# Altium PCB PCB1.PcbDoc
Units mil, origin at the board's own origin, x right, y up, seen from the top; angles counter-clockwise.
Board outline 2587.62 x 2587.62 mil, 2 copper layers (Top Layer, Bottom Layer); 11 components, 8 nets, 33 pads, 2 vias.
Unrouted connection lines stored in the file: 25.
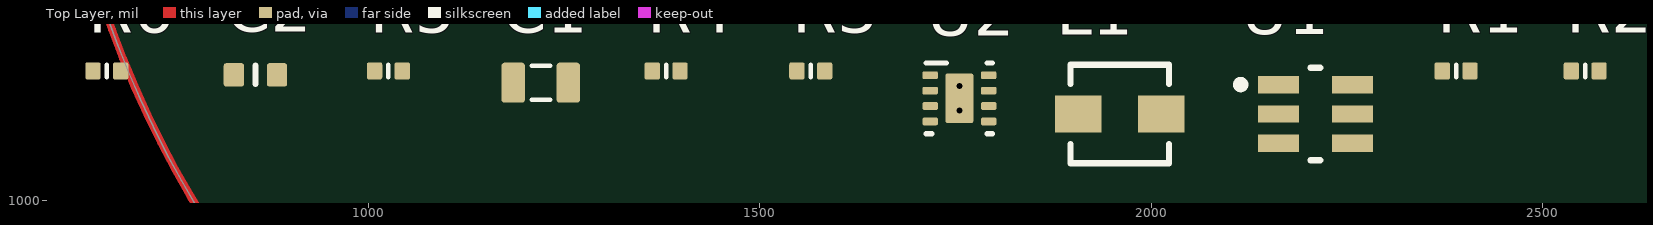
[diagram p0: Top Layer view]
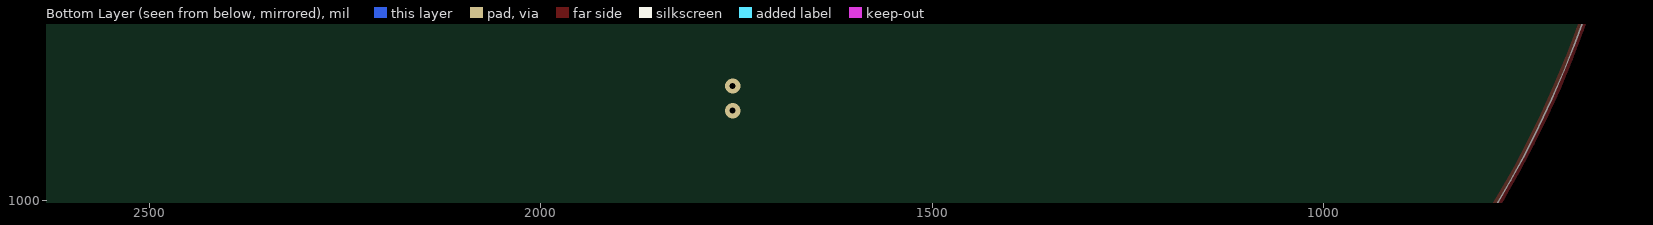
[diagram p1: Bottom Layer view, seen from below]

## Layer stack, top to bottom
Top Solder: solder mask 0.4, Solder Resist, Dk 3.5
Top Layer: signal copper 1.4
Dielectric 1: dielectric 12.6, FR-4, Dk 4.8
Bottom Layer: signal copper 1.4
Bottom Solder: solder mask 0.4, Solder Resist, Dk 3.5

## Board outline
593.57,1660.33 ccw(c1887.39,1660.33) 1887.39,366.52 ccw(c1887.39,1660.33) 3181.2,1660.33 ccw(c1887.39,1660.33) 1887.39,2954.14 ccw(c1887.39,1660.33)

## Design rules (kind name [scope] priority, off if disabled: settings)
Clearance [All] p1: gap=10 ignorepadtopadclearanceinfootprint=FALSE except(0: Arc-Hole Track-Hole SMDPad-Hole THPad-Hole Via-Hole Fill-Hole Poly-Hole Region-Hole Text-Hole)
PolygonConnect [All] p1: connectstyle=Relief reliefconductorwidth=10 reliefentries=4 polygonreliefangle="90 Angle" airgapwidth=10
RoutingVias [All] p1: holewidth=28 width=50 viastyle="Through Hole" minholewidth=28 minwidth=50 maxholewidth=28 maxwidth=50
SolderMaskExpansion [All] p1: expansion=4 istentingtop=FALSE
Width [All] p1: maxlimit=10 minlimit=10 preferedwidth=10
30 further rules are at their usual default settings.

## Components (designator, comment, footprint, x,y, rotation, side; value= is the part's Value field where it differs from the comment)
C1 "Capacitor 22µF +/-40% 16V 0805" CAPC0805(2012)145_L 1220,1150 r0 top value=22µF
C2 "Capacitor 10µF +/-20% 10V 0603" CAPC0603(1608)100_L 855,1160 r0 top value=10µF
L1 "IHLP1212BZER2R2M11" FP-IHLP-1212BZ-11-MFG 1960,1110 r0 top
R1 "Resistor 10K  +/-1 % 0402 63 mW" RESC0402(1005)_L 2390,1165 r0 top value=10k
R2 "Resistor 10K  +/-1 % 0402 63 mW" RESC0402(1005)_L 2555,1165 r0 top value=10k
R3 "Resistor 100K +/-1 % 0402 63 mW" RESC0402(1005)_L 1565,1165 r0 top value=100k
R4 "Resistor 100K +/-1 % 0402 63 mW" RESC0402(1005)_L 1380,1165 r0 top value=100k
R5 "Resistor 100K +/-1 % 0402 63 mW" RESC0402(1005)_L 1025,1165 r0 top value=100k
R6 "Resistor 100K +/-1 % 0402 63 mW" RESC0402(1005)_L 665,1165 r0 top value=100k
U1 "MAX16150AUT+T" FP-U6-1-MFG 2210,1110 r0 top
U2 "TPS62162DSGR" DSG0008A_V 1755,1130 r0 top

## Footprints (in the part's own frame and the unit in brackets; to place one, negate y for a bottom-side part, rotate by r counter-clockwise, add the part's x,y. Pads: shape width x height; smd on the part's side, far side on the other; paste and mask are expansions set on the pad)
CAPC0603(1608)100_L [mm] "Chip Capacitor, Body 1.6x0.8mm, Height 1.0mm, IPC High Density"
  rrect25% 0.66x0.76 smd: 1(-0.7,0) 2(0.7,0)
  silkscreen extent 0,-0.3 0,0.3, body extent -0.8,-0.4 0.8,0.4, height 0.95
CAPC0805(2012)145_L [mm] "Chip Capacitor, Body 2.0x1.2mm, Height 1.45mm, IPC High Density"
  rrect25% 0.76x1.3 smd: 1(-0.9,0) 2(0.89,0)
  silkscreen extent -0.3,-0.55 0.3,0.55, body extent -1,-0.6 1,0.6, height 1.45
DSG0008A_V [mm] "SON, 8-Leads, Body 2x2mm, Pitch 0.5mm, Thermal Pad 1.6x0.9mm, TI Recommended"
  rrect40% 0.5x0.25 smd: 1(-0.95,0.75) 2(-0.95,0.25) 3(-0.95,-0.25) 4(-0.95,-0.75) 5(0.95,-0.75) 6(0.95,-0.25) 7(0.95,0.25) 8(0.95,0.75)
  rrect11% 0.9x1.6 smd paste-0.45: 9(0,0)
  silkscreen extent -1.07,-1.15 1.07,1.15, body extent -1.05,-1.05 1.05,1.05, height 0.8
FP-IHLP-1212BZ-11-MFG [mm]
  rect 1.5x1.2 smd paste+0 mask+0: 1(-1.35,0) 2(1.35,0)
  silkscreen extent -1.6,-1.6 1.6,1.6, body extent -2.2,-1.7 2.2,1.7, height 0.25
FP-U6-1-MFG [mm]
  rect 1.33x0.56 smd paste+0 mask+0: 1(-1.2,0.95) 2(-1.2,0) 3(-1.2,-0.95) 4(1.2,-0.95) 5(1.2,0) 6(1.2,0.95)
  silkscreen extent -2.55,-1.5 0.16,1.5, body extent -1.96,-1.73 1.96,1.73, height 0.25
RESC0402(1005)_L [mm] "Chip Resistor, Body 1.0x0.5mm, IPC High Density"
  rrect25% 0.5x0.55 smd: 1(-0.45,0) 2(0.45,0)
  silkscreen extent 0,-0.2 0,0.2, body extent -0.5,-0.25 0.5,0.25, height 0.3

## Part data
C1: library part CMP-001-00081-4, "Chip Capacitor, 22µF +/-40%, 16V, 0805, Thickness 1.45 mm", Case/Package=0805, Max Operating Temperature=85°C, Min Operating Temperature=-55°C, Tolerance=5%, Voltage Rating=16V, Mounting Technology=SMT, Pins=2
C2: library part CMP-001-00075-4, "Chip Capacitor, 10µF +/-20%, 10V, 0603, Thickness 1 mm", Case/Package=0603, Max Operating Temperature=85°C, Min Operating Temperature=-55°C, Tolerance=10%, Voltage Rating=10V, Mounting Technology=SMT, Pins=2
L1: library part CMP-02424-000689-1, "FIXED IND 2.2UH 3A 46 MOHM SMD", Case/Package=1212, Current Rating=3A, DC Resistance (DCR)=46mR, Inductance=2.2uH, Inductance Tolerance=20%, Max Operating Temperature=125°C, Min Operating Temperature=-55°C, Package Quantity=3000, Saturation Current=3.3A, Self Resonant Frequency=55MHz, Test Frequency=100kHz, Contact Plating=Tin, Core Material=Metal, Depth=3.2mm, Height=2mm, Height - Seated (Max)=0.079inch, Lead Free="Lead Free", Length=3.6mm, Max DC Current=3A, Military Standard=Not, Mount="Surface Mount", Number of Pins=2, Packaging="Tape and Reel", Radiation Hardening=No, Rated Current-Max=3A, RMS Current (Irms)=3A, RoHS Compliant=Yes, Series=IHLP-1212BZ-11, Shielding=Shielded, Termination=SMD/SMT, Tolerance=20%, Width=3mm
R1 R2: library part CMP-009-00149-3, "Chip Resistor, 10 kOhms, +/-1 %, 63 mW, -55 to 125 degC, 0402", Case/Package=0402, Max Operating Temperature=155°C, Min Operating Temperature=-55°C, Power=63mW, Tolerance=1%, Pins=2
R3 R4 R5 R6: library part CMP-009-00168-3, "Chip Resistor, 100 kOhms, +/-1 %, 63 mW, -55 to 155 degC, 0402", Case/Package=0402, Max Operating Temperature=155°C, Min Operating Temperature=-55°C, Power=63mW, Tolerance=1%, Pins=2
U1: library part CMP-05723-001129-1, "IC SUPERVISOR 1 CHANNEL SOT23-6"
U2: library part CMP-0323-00316-3, "Buck Step Down Regulator with 3 to 17 V Input and 3.3 V Output, -40 to 85 degC, 8-Pin WSON (DSG), Green (RoHS & no Sb/Br)", Manufacturer="Texas Instruments", Rating=Catalog, Switch Current Limit(Typ)(A)=1.8, Code_JEDEC=MO-229, ComponentLink1Description=Datasheet, ComponentLink1URL=http://www.ti.com/general/docs/lit/getliterature.tsp?genericPartNumber=TPS62162&fileType=pdf, ComponentLink2Description="Package Specification", ComponentLink2URL=http://www.ti.com/litv/pdf/mpds308a, ComponentLink3Description="URL Link1", ComponentLink3URL="Samples URL:http://www.ti.com/product/tps62162#samples", DatasheetVersion=SLVSAM2A, Duty Cycle(Max)(%)=100, Eco-Plan="Green (RoHS & no Sb/Br)", Iout(Max)(A)=1, Iq(Typ)(mA)=0.017, Mounting Technology="Surface Mount", PackageDescription="8-Pin Plastic Small Outline No-Lead, 2 x 2 x 0.8 mm Body, 0.5 mm Pitch, Exposed Pad", PackageReference=DSG0008A, PackageVersion="revB, Oct-2010", PartNumber=TPS62162DSGR, Preset Vout(V)=3.3, Regulated Outputs(#)=1, SubFamily="Step-Down Regulator", Synchronous Rectification=TRUE, Topology=Buck, Vin(Max)(V)=17, Vin(Min)(V)=3, Vout(Max)(V)=3.3, Vout(Min)(V)=3.3

## Via types
v1: diameter 19.68, hole 7.87, Top Layer to Bottom Layer, 2 vias

## Nets (pads, with @x,y where several pads share a name; then routed paths per layer and width w, separated by ;. In a path a pad name is that pad's centre, name@x,y a point inside that pad or via, vN(x,y) a via of type N, cw(c..) or ccw(c..) an arc to the next point about the centre after c; other vN are vias at no path point)
+3V3_EN: R5.2 U1.4 U2.3
GND: C1.1 C2.1 R5.1 R6.1 U1.1 U1.2 U2.1 U2.4 U2.5 U2.9
  other v1: 1755,1114.25 1755,1145.75
NetC1_2: C1.2 L1.2 R3.2 R4.2 U2.6
NetL1_1: L1.1 U2.7
NetR1_2: R1.2 U1.5
PG: R4.1 U2.8
V_IN: C2.2 R1.1 R2.1 U1.3 U2.2
Vmon1: R2.2 R3.1 R6.2 U1.6
copper on no net: | length 8129.3
  Top Layer w10: 3181.2,1660.33 ccw(c1887.39,1660.33) 3181.2,1660.33

## Silkscreen, mask and mechanical layers (free items; w line width, h text height)
Mechanical 1:
  lines w20.24: 593.57,1660.33 cw(c1887.39,1660.33) 1887.39,2954.14 ; 593.57,1660.33 ccw(c1887.39,1660.33) 1887.39,366.52 ; 593.57,1660.33 cw(c1887.39,1660.33) 1887.39,2954.14 ; 593.57,1660.33 ccw(c1887.39,1660.33) 1887.39,366.52 ; 1887.39,366.52 ccw(c1887.39,1660.33) 3181.2,1660.33 ; 1887.39,366.52 ccw(c1887.39,1660.33) 3181.2,1660.33 ; 1887.39,2954.14 cw(c1887.39,1660.33) 3181.2,1660.33 ; 1887.39,2954.14 cw(c1887.39,1660.33) 3181.2,1660.33